# Altium PCB Switch_MCU.PcbDoc
Units mil, origin at the board's own origin, x right, y up, seen from the top; angles counter-clockwise.
Board outline 2390 x 2435 mil, 2 copper layers (Top Layer, Bottom Layer); 69 components, 57 nets, 253 pads, 0 vias.
Unrouted connection lines stored in the file: 142.
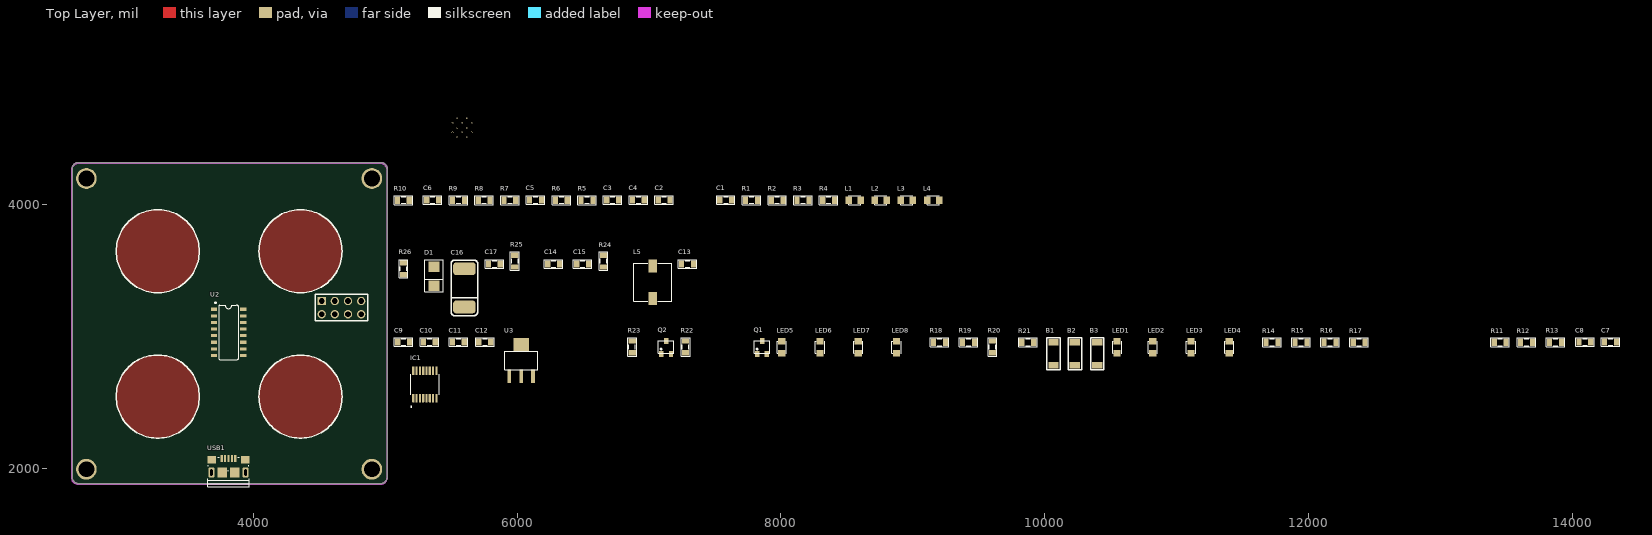
[diagram p0: Top Layer view]
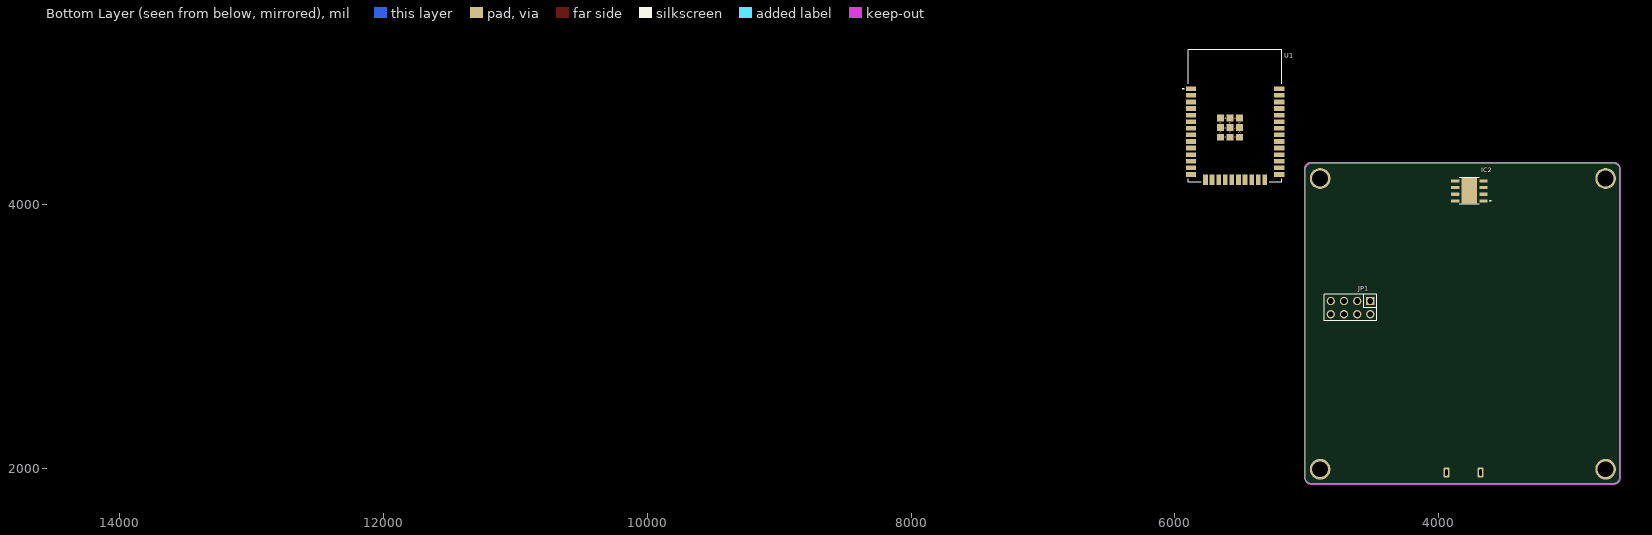
[diagram p1: Bottom Layer view, seen from below]

## Layer stack, top to bottom
Top Solder: solder mask 0.4, Solder Resist, Dk 3.5
Top Layer: signal copper 1.4
Dielectric 1: dielectric 12.6, FR-4, Dk 4.8
Bottom Layer: signal copper 1.4
Bottom Solder: solder mask 0.4, Solder Resist, Dk 3.5

## Board outline
2625,1932.5 2625,4267.5 cw(c2675,4267.5) 2675,4317.5 4965,4317.5 cw(c4965,4267.5) 5015,4267.5 5015,1932.5 cw(c4965,1932.5) 4965,1882.5 2675,1882.5 cw(c2675,1932.5)

## Design rules (kind name [scope] priority, off if disabled: settings)
Clearance [All] p1: gap=15 ignorepadtopadclearanceinfootprint=TRUE
PolygonConnect [All] p1: thpad.connectstyle=Relief thpad.reliefconductorwidth=10 thpad.reliefentries=4 thpad.polygonreliefangle="90 Angle" thpad.airgapwidth=10 smdpad.connectstyle=Relief smdpad.reliefconductorwidth=10 smdpad.reliefentries=4 smdpad.polygonreliefangle="90 Angle" smdpad.airgapwidth=10 via.connectstyle=Direct via.reliefconductorwidth=10 via.reliefentries=4 via.polygonreliefangle="90 Angle" via.airgapwidth=10
RoutingVias [All] p1: holewidth=28 width=50 viastyle="Through Hole" minholewidth=28 minwidth=50 maxholewidth=28 maxwidth=50
SolderMaskExpansion [All] p1: expansion=4 istentingtop=FALSE
Width [All] p1: maxlimit=100 minlimit=10 preferedwidth=50
30 further rules are at their usual default settings.

## Classes and differential pairs
component class U_TTP224: C1 C2 C3 C4 C5 C6 IC1 L1 L2 L3 L4 R1 R2 R3 R4 R5 R6 R7 R8 R9 R10
component class U_TPS5430: C13 C14 C15 C16 C17 D1 IC2 L5 R24 R25 R26
component class U_ESP32: B1 B2 B3 C7 C8 C9 C10 C11 C12 JP1 LED1 LED2 LED3 LED4 LED5 LED6 LED7 LED8 Q1 Q2 R11 R12 R13 R14 R15 R16 R17 R18 R19 R20 R21 R22 R23 U1 U2 U3 USB1

## Components (designator, comment, footprint, x,y, rotation, side; value= is the part's Value field where it differs from the comment)
B1 "Button 3x4x2.5" "Button 3x4x2.5" 10067.5,2867.5 r90 top
B2 "Button 3x4x2.5" "Button 3x4x2.5" 10230,2867.5 r90 top
B3 "Button 3x4x2.5" "Button 3x4x2.5" 10400,2867.5 r90 top
C1 "30pF" CAP_0805 7580,4122.5 r0 top value=33p
C2 "30pF" CAP_0805 7112.5,4122.5 r0 top value=33p
C3 "100nF" CAP_0805 6722.5,4122.5 r0 top value=33p
C4 "10uF" CAP_0805 6917.5,4122.5 r0 top value=33p
C5 "30pF" CAP_0805 6137.5,4122.5 r0 top value=33p
C6 "30pF" CAP_0805 5357.5,4122.5 r0 top value=33p
C7 "100nF" CAP_0805 14290,3045 r0 top value=33p
C8 "10uF" CAP_0805 14095,3045 r0 top value=33p
C9 "10uF" CAP_0805 5137.5,3045 r0 top value=33p
C10 "100nF" CAP_0805 5332.5,3045 r0 top value=33p
C11 "10uF" CAP_0805 5552.5,3045 r0 top value=33p
C12 "100nF" CAP_0805 5752.5,3045 r0 top value=33p
C13 "100nF" CAP_0805 7290,3637.5 r0 top value=33p
C14 "100nF" CAP_0805 6275,3637.5 r0 top value=33p
C15 "10uF" CAP_0805 6495,3637.5 r0 top value=33p
C16 "220uF" CAP_7343 5600,3372.5 r90 top
C17 "10uF" CAP_0805 5825,3637.5 r0 top value=33p
D1 "SS14" DO-214AC(SMA) 5367.5,3477.5 r90 top value=1N5007
IC1 "TTP224" TTP224 5280,2655 r90 top
IC2 "TPS5430-2" TPS5430 3767.18,4102.19 r0 bottom
JP1 "JP 2x4 2.54" "JP 2x4 DT" 4667.5,3217.5 r0 bottom
L1 "LED" LED-0805-Red 8515,4032.5 r0 top value="LED 3 ly Single Colour"
L2 "LED" LED-0805-Red 8712.5,4032.5 r0 top value="LED 3 ly Single Colour"
L3 "LED" LED-0805-Red 8910,4032.5 r0 top value="LED 3 ly Single Colour"
L4 "LED" LED-0805-Red 9110,4032.5 r0 top value="LED 3 ly Single Colour"
L5 "22uH" L_SMD 7022.5,3422.5 r0 top value="150 mH"
LED1 "LED" LED-0805-Red 10550,2872.5 r90 top value="LED 3 ly Single Colour"
LED2 "LED" LED-0805-Red 10820,2872.5 r90 top value="LED 3 ly Single Colour"
LED3 "LED" LED-0805-Red 11110,2872.5 r90 top value="LED 3 ly Single Colour"
LED4 "LED" LED-0805-Red 11400,2872.5 r90 top value="LED 3 ly Single Colour"
LED5 "LED" LED-0805-Red 8007.5,2872.5 r90 top value="LED 3 ly Single Colour"
LED6 "LED" LED-0805-Red 8297.5,2872.5 r90 top value="LED 3 ly Single Colour"
LED7 "LED" LED-0805-Red 8587.5,2872.5 r90 top value="LED 3 ly Single Colour"
LED8 "LED" LED-0805-Red 8877.5,2872.5 r90 top value="LED 3 ly Single Colour"
Q1 "C1815" SOT23D 7857.5,2915 r0 top
Q2 "C1815" SOT23D 7130,2915 r0 top
R1 "1k" RES-SMD-0805 7777.5,4032.5 r0 top
R2 "1k" RES-SMD-0805 7972.5,4032.5 r0 top
R3 "1k" RES-SMD-0805 8167.5,4032.5 r0 top
R4 "1k" RES-SMD-0805 8362.5,4032.5 r0 top
R5 "0R" RES-SMD-0805 6530,4032.5 r0 top
R6 "0R" RES-SMD-0805 6335,4032.5 r0 top
R7 "0R" RES-SMD-0805 5945,4032.5 r0 top
R8 "0R" RES-SMD-0805 5750,4032.5 r0 top
R9 "0R" RES-SMD-0805 5555,4032.5 r0 top
R10 "0R" RES-SMD-0805 5137.5,4032.5 r0 top
R11 "10k" RES-SMD-0805 13455,2955 r0 top
R12 "10k" RES-SMD-0805 13655,2955 r0 top
R13 "10k" RES-SMD-0805 13875,2955 r0 top
R14 "1k" RES-SMD-0805 11725,2955 r0 top
R15 "1k" RES-SMD-0805 11945,2955 r0 top
R16 "1k" RES-SMD-0805 12165,2955 r0 top
R17 "1k" RES-SMD-0805 12385,2955 r0 top
R18 "1k" RES-SMD-0805 9202.5,2955 r0 top
R19 "1k" RES-SMD-0805 9422.5,2955 r0 top
R20 "1k" RES-SMD-0805 9605,2920 r90 top
R21 "1k" RES-SMD-0805 9872.5,2955 r0 top
R22 "10k" RES-SMD-0805 7277.5,2920 r90 top
R23 "10k" RES-SMD-0805 6872.5,2920 r90 top
R24 "100k" RES-SMD-0805 6655,3570 r90 top
R25 "10k" RES-SMD-0805 5982.5,3570 r90 top
R26 "6.2k" RES-SMD-0805 5137.5,3512.5 r90 top
U1 "ESP32-WROOM-32" MODULE_ESP32-WROOM-32 5542.85,4670.41 r180 bottom
U2 "CH340C" SO016 3812.26,3030 r270 top
U3 "LM1117-ADJ" LM1117-SOP 6030,2747.5 r0 top
USB1 "USB Micro 5p DIP" "USB Micro 5p DIP" 3811.18,1967.18 r0 top

## Footprints (in the part's own frame and the unit in brackets; to place one, negate y for a bottom-side part, rotate by r counter-clockwise, add the part's x,y. Pads: shape width x height; smd on the part's side, far side on the other; paste and mask are expansions set on the pad)
"Button 3x4x2.5" [mm]
  rect 1.3x2 smd: 1(-2.2,0) 2(2.2,0)
  silkscreen extent -3.05,-1.27 3.05,1.27, body extent -2.45,-1.45 2.45,1.45, height 2
CAP_0805 [mil]
  rect 39.37x55 smd: 1(-42.85,-88.11) 2(47.15,-88.11)
  silkscreen extent -68,-122 72,-55, body extent -38,-114 42,-64, height 24
CAP_7343 [mm] "Capacitor Tantalum 7343"
  rrect50% 2.5x4.3 smd: 1(-3.81,0) 2(3.556,0)
  silkscreen extent -5.46,-2.54 5.21,2.54, body extent -3.81,-2.29 3.56,2.29, height 3
DO-214AC(SMA) [mm] "DO-214AC Diode Smallest Size"
  rect 2x2.1 smd: 1(1.245,-0.076) 2(-2.367,-0.076)
  silkscreen extent -3.56,-1.86 2.62,1.76, body extent -3.13,-1.38 2.07,1.22, height 2.4
"JP 2x4 DT" [mm]
  rect 1.61x1.6 hole 1.1: 1(-3.81,-1.27)
  oval 1.61x1.6 hole 1.1: 2(-1.27,-1.27) 3(1.27,-1.27) 4(3.81,-1.27) 5(3.81,1.27) 6(1.27,1.27) 7(-1.27,1.27) 8(-3.81,1.27)
  silkscreen extent -5.08,-2.54 5.08,2.54, body extent -5.08,-2.54 5.08,2.54, height 8.55
L_SMD [mm]
  rect 1.7x2.5 smd: 1(0.15,2.8) 2(0.15,-3.4)
  silkscreen extent -3.5,-3.95 3.8,3.35, body extent -3.5,-3.95 3.8,3.35, height 4.05
LED-0805-Red [mil]
  rect 50x55 smd: 1(0,0) 2(90,0)
  silkscreen extent 0,-35 90,35, body extent 5,-25 85,25, height 43
LM1117-SOP [mm]
  rect 0.7x2.54 smd: 1(-2.3,-1.27) 2(0,-1.27) 3(2.3,-1.27)
  rect 3x2.54 smd: 2(0,4.826)
  silkscreen extent -3.17,0 3.17,3.56, body extent -3.25,-1.78 3.25,5.18, height 1.68
MODULE_ESP32-WROOM-32 [mm]
  rect 2x0.9 smd: 1(-8.5,5.26) 2(-8.5,3.99) 3(-8.5,2.72) 4(-8.5,1.45) 5(-8.5,0.18) 6(-8.5,-1.09) 7(-8.5,-2.36) 8(-8.5,-3.63) 9(-8.5,-4.9) 10(-8.5,-6.17) 11(-8.5,-7.44) 12(-8.5,-8.71) 13(-8.5,-9.98) 14(-8.5,-11.25) 25(8.5,-11.25) 26(8.5,-9.98) 27(8.5,-8.71) 28(8.5,-7.44) 29(8.5,-6.17) 30(8.5,-4.9) 31(8.5,-3.63) 32(8.5,-2.36) 33(8.5,-1.09) 34(8.5,0.18) 35(8.5,1.45) 36(8.5,2.72) 37(8.5,3.99) 38(8.5,5.26)
  rect 0.9x2 smd: 15(-5.715,-12.25) 16(-4.445,-12.25) 17(-3.175,-12.25) 18(-1.905,-12.25) 19(-0.635,-12.25) 20(0.635,-12.25) 21(1.905,-12.25) 22(3.175,-12.25) 23(4.445,-12.25) 24(5.715,-12.25)
  rect 1.33x1.33 smd: 39_1(-2.835,-0.405) 39_2(-1,-0.405) 39_3(0.835,-0.405) 39_4(-2.835,-2.24) 39_5(-1,-2.24) 39_6(0.835,-2.24) 39_7(-2.835,-4.075) 39_8(-1,-4.075) 39_9(0.835,-4.075)
  round 0.3 hole 0.2: 39_10(-1.917,-0.405) 39_11(-0.082,-0.405) 39_12(-2.835,-1.322) 39_13(-1,-1.322) 39_14(0.835,-1.322) 39_15(-1.917,-2.24) 39_16(-0.082,-2.24) 39_17(-2.835,-3.157) 39_18(-1,-3.157) 39_19(0.835,-3.157) 39_20(-1.917,-4.075) 39_21(-0.082,-4.075)
  silkscreen extent -10.1,-12.75 9,12.75, body extent -9.02,-12.75 8.98,12.75, height 3.2
RES-SMD-0805 [mil]
  rect 39.37x55 smd: 1(-45,0) 2(45,0)
  silkscreen extent -70,-34 70,33, body extent -39,-25 39,25, height 31
SO016 [mm]
  rect 0.6x1.2 smd: 1(-4.445,-2.8) 2(-3.175,-2.8) 3(-1.905,-2.8) 4(-0.635,-2.8) 5(0.635,-2.8) 6(1.905,-2.8) 7(3.175,-2.8) 8(4.445,-2.8) 9(4.445,2.8) 10(3.175,2.8) 11(1.905,2.8) 12(0.635,2.8) 13(-0.635,2.8) 14(-1.905,2.8) 15(-3.175,2.8) 16(-4.445,2.8)
  silkscreen extent -5.84,-2.67 5.26,1.95, body extent -4.99,-3.13 4.99,3.1, height 1.58
SOT23D [mm] "SOT 23C - 1-3-2 - BCE"
  rect 0.85x1.2 smd: 1(-0.95,-1.25) 2(0.94,-1.245) 3(0,1.25)
  silkscreen extent -1.5,-1.14 1.5,1.32, body extent -1.5,-1.17 1.5,1.33, height 1.06
TPS5430 [mm]
  rrect10% 1.55x0.6 smd mask+0: 1(-2.692,1.897) 2(-2.692,0.627) 3(-2.692,-0.643) 4(-2.692,-1.913) 5(2.708,-1.913) 6(2.708,-0.643) 7(2.708,0.627) 8(2.708,1.897)
  rect 2.95x4.9 smd paste-3 mask+0: 9(0.008,-0.008)
  silkscreen extent -4.16,-2.53 1.96,2.52, body extent -3,-2.45 3,2.45, height 1.7
TTP224 [mm]
  rrect25% 1.65x0.41 smd: 1(-3.129,1.71) 2(-3.129,1.075) 3(-3.129,0.44) 4(-3.129,-0.195) 5(-3.129,-0.83) 6(-3.129,-1.465) 7(-3.129,-2.1) 8(-3.129,-2.735) 9(2.131,-2.735) 10(2.131,-2.1) 11(2.131,-1.465) 12(2.131,-0.83) 13(2.131,-0.195) 14(2.131,0.44) 15(2.131,1.075) 16(2.131,1.71)
  silkscreen extent -4.88,-3.26 1.45,2.24, body extent -3.5,-2.96 2.5,1.94, height 1.75
"USB Micro 5p DIP" [mm]
  rect 0.4x1.35 smd mask+0.05: 1(-1.3,2.675) 2(-0.65,2.675) 3(0,2.675) 4(0.65,2.675) 5(1.3,2.675)
  rrect60% 1.2x2 hole 0.5 slot 1.2 at 90 deg: 5(-3.3,0) 5(3.3,0)
  rect 1.6x1.4 smd: 5(-3.2,2.45) 5(3.2,2.45)
  rect 1.9x1.9 smd paste-10: 5(-1.2,0) 5(1.2,0)
  silkscreen extent -4,-2.75 4,2.95, body extent -3.93,-2.76 3.93,2.9, height 2.85

## Part data
C1 C2 C3 C4 C5 C6 C7 C8 C9 C10 C11 C12 C13 C14 C15 C17: library part CapSMD, "Capacitor", LatestRevisionDate=17-Jul-2002, LatestRevisionNote="Re-released for DXP Platform.", PackageReference=RAD-0.3, Published=8-Jun-2000, Publisher="Altium Limited"
C16: library part CAP_TAN_SMD, "Polazied Tantalum Capacitor"
D1: library part "Diode SMD", "SS34 Diode Schottky 3A 40V SMA(DO-214AC)", Code - JEDEC=DO-214-AB, Published=8-Jun-2000, Publisher="Altium Limited", Revision="July-2002: Re-released for DXP Platform."
JP1: library part "JP 2x4 2.54 Duc Thang", "Cắm", Chung_Loai=Cắm, Don_Vi=Con, Ma_Hang=MH002686, Ten_Linh_Kien="Jump Đôi Đực 2.54MM 2x40P Thẳng 11MM"
L1 L2 L3 L4 LED1 LED2 LED3 LED4 LED5 LED6 LED7 LED8: "LED Single colour Green and Red"
L5: library part Inductor, "CD73R 22uH 1.23A 7345"
Q1 Q2: library part 2SC1815, "NPN 600mW, ECB"
R1 R2 R3 R4 R5 R6 R7 R8 R9 R10 R11 R12 R13 R14 R15 R16 R17 R18 R19 R20 R21 R22 R23 R24 R25 R26: library part "Resistor - SMD", "Resistor", Manufacturer="Generic Components", Class=Passive, Published=08/06/2000, Publisher="Altium Hobart Technology Centre"
U1: "Bluetooth, WiFi Transceiver Module 2.4GHz ~ 2.5GHz Surface Mount", Package="Module Espressif Systems", Digi-Key_Part_Number=1904-1010-1-ND, Digi-Key_Purchase_URL=https://www.digikey.com/product-detail/en/espressif-systems/ESP32-WROOM-32/1904-1010-1-ND/8544305?utm_source=snapeda&utm_medium=aggregator&utm_campaign=symbol, MF="Espressif Systems", MP=ESP32-WROOM-32, SnapEDA_Link=https://www.snapeda.com/parts/ESP32-WROOM-32/Espressif%20Systems/view-part/2753322/?ref=snap
U2: "USB to serial chip CH340", Package=Package, Availability=Unavailable, Check_prices=https://www.snapeda.com/parts/CH340C/WCH/view-part/5428851/?ref=eda, MF=WCH, MP=CH340C, Price=None, SnapEDA_Link=https://www.snapeda.com/parts/CH340C/WCH/view-part/5428851/?ref=snap
U3: "800mA Low-Dropout Linear Regulator", Creator="Nguyen Ba Bien", Website=http://group3i.net
USB1: "USB Type B", Ma_Hang=MH005145, Ten="MicroUSB MK5P DIP"

## Free pads (board coordinates)
  round 157.48 hole 120: 0(2733.32,1991.99) 0(2733.32,4196.99) 0(4898.32,1991.99) 0(4898.32,4196.99)

## Nets (pads, with @x,y where several pads share a name; then routed paths per layer and width w, separated by ;. In a path a pad name is that pad's centre, name@x,y a point inside that pad or via, vN(x,y) a via of type N, cw(c..) or ccw(c..) an arc to the next point about the centre after c; other vN are vias at no path point)
+3.3V: C3.2 C4.2 C7.1 C8.1 C11.1 C12.1 C16.1 C17.1 IC1.6 L5.2 R5.2 R6.2 R7.2 R11.1 R12.1 R13.1 R14.2 R15.2 R16.2 R17.2 R25.2 U1.2 U2.4 U2.16 U3.2
+5: C9.1 C10.1 U3.3 USB1.1
+12V: C14.2 C15.2 IC2.7 JP1.1 JP1.2 R24.1
AHLB: IC1.5 R5.1
CH340_RXD: U1.35 U2.3
CH340_TXD: U1.34 U2.2
D_N: U2.6 USB1.2
D_P: U2.5 USB1.3
DTR: Q2.2 R22.1 U2.13
EN: B2.2 Q1.3 R12.2 U1.3
GND: B1.1 B2.1 B3.1 C1.1 C2.1 C3.1 C4.1 C5.1 C6.1 C7.2 C8.2 C9.2 C10.2 C11.2 C12.2 C14.1 C15.1 C16.2 C17.2 D1.1 IC1.10 IC2.6 IC2.9 JP1.3 JP1.4 L1.2 L2.2 L3.2 L4.2 R8.2 R9.2 R10.2 R18.2 R19.2 R20.2 R21.2 R26.1 U1.1 U2.1 U3.1 USB1.5
IO0: B3.2 Q2.3 R13.2 U1.25
IO13: U1.16
IO16: U1.27
IO17: U1.28
IO18: U1.30
IO19: IC1.16 R4.1 U1.31
IO21: IC1.15 R3.1 U1.33
IO22: IC1.14 R2.1 U1.36
IO23: IC1.13 R1.1 U1.37
IO25: U1.10
IO26: LED3.1 LED6.2 U1.11
IO27: B1.2 LED4.1 LED5.2 R11.2 U1.12
IO32: LED1.1 LED8.2 U1.8
IO33: LED2.1 LED7.2 U1.9
LPMB: IC1.8 R7.1
MOT0: IC1.9 R10.1
NetC1_2: C1.2 IC1.1
NetC2_2: C2.2 IC1.2
NetC5_2: C5.2 IC1.3
NetC6_2: C6.2 IC1.4
NetC13_1: C13.1 D1.2 IC2.8 L5.1
NetC13_2: C13.2 IC2.1
NetIC2_4: IC2.4 R25.1 R26.2
NetIC2_5: IC2.5 R24.2
NetL1_1: L1.1 R1.2
NetL2_1: L2.1 R2.2
NetL3_1: L3.1 R3.2
NetL4_1: L4.1 R4.2
NetLED1_2: LED1.2 R18.1
NetLED2_2: LED2.2 R19.1
NetLED3_2: LED3.2 R20.1
NetLED4_2: LED4.2 R21.1
NetLED5_1: LED5.1 R14.1
NetLED6_1: LED6.1 R15.1
NetLED7_1: LED7.1 R16.1
NetLED8_1: LED8.1 R17.1
NetQ1_1: Q1.1 R22.2
NetQ2_1: Q2.1 R23.2
OD: IC1.11 R9.1
RL1: JP1.8
RL2: JP1.7
RL3: JP1.6
RL4: JP1.5
RST: Q1.2 R23.1 U2.14
SM: IC1.12 R8.1
TOG: IC1.7 R6.1
pads on no net: IC2.2 IC2.3 U1.4 U1.5 U1.6 U1.7 U1.13 U1.14 U1.15 U1.17 U1.18 U1.19 U1.20 U1.21 U1.22 U1.23 U1.24 U1.26 U1.29 U1.32 U1.38 U1.39_1 U1.39_2 U1.39_3 U1.39_4 U1.39_5 U1.39_6 U1.39_7 U1.39_8 U1.39_9 U1.39_10 U1.39_11 U1.39_12 U1.39_13 U1.39_14 U1.39_15 U1.39_16 U1.39_17 U1.39_18 U1.39_19 U1.39_20 U1.39_21 U2.7 U2.8 U2.9 U2.10 U2.11 U2.12 U2.15 USB1.4

## Polygon pours and split planes (outlines as drawn)
NetC6_2 on Top Layer "100" (solid, pour order 7): 4042.11,2543.24 ccw(c4357.07,2543.24) 4357.07,2228.28 ccw(c4357.07,2543.24) 4672.03,2543.24 ccw(c4357.07,2543.24) 4357.07,2858.2 ccw(c4357.07,2543.24)
NetC5_2 on Top Layer "100" (solid, pour order 6): 2959.61,2543.24 ccw(c3274.57,2543.24) 3274.57,2228.28 ccw(c3274.57,2543.24) 3589.53,2543.24 ccw(c3274.57,2543.24) 3274.57,2858.2 ccw(c3274.57,2543.24)
NetC2_2 on Top Layer "100" (solid, pour order 5): 4042.11,3645.74 ccw(c4357.07,3645.74) 4357.07,3330.78 ccw(c4357.07,3645.74) 4672.03,3645.74 ccw(c4357.07,3645.74) 4357.07,3960.7 ccw(c4357.07,3645.74)
NetC1_2 on Top Layer "100" (solid, pour order 4): 3274.57,3330.78 cw(c3274.57,3645.74) 2959.61,3645.74 cw(c3274.57,3645.74) 3274.57,3960.7 cw(c3274.57,3645.74) 3589.53,3645.74 cw(c3274.57,3645.74)

## Keep-outs
Keep-Out Layer:
  lines w10: 2623.32,1926.99 ccw(c2673.32,1926.99) 2673.32,1876.99 4963.32,1876.99 ccw(c4963.32,1926.99) 5013.32,1926.99 5013.32,4261.99 ccw(c4963.32,4261.99) 4963.32,4311.99 2863.32,4311.99 2673.32,4311.99 ccw(c2673.32,4261.99) 2623.32,4261.99 2623.32,1926.99 ; 2625,1932.5 ccw(c2675,1932.5) 2675,1882.5 4965,1882.5 ccw(c4965,1932.5) 5015,1932.5 5015,4267.5 ccw(c4965,4267.5) 4965,4317.5 2865,4317.5 2675,4317.5 ccw(c2675,4267.5) 2625,4267.5 2625,1932.5

## Silkscreen, mask and mechanical layers (free items; w line width, h text height)
Top Overlay:
  circle w10: c4357.07,2543.24 r314.96
  circle w10: c4357.07,3645.74 r314.96
  circle w10: c3274.57,2543.24 r314.96
  circle w10: c3274.57,3645.74 r314.96
  lines w10: 4467.5,3117.5 4867.5,3117.5 4867.5,3317.5 4467.5,3317.5 4467.5,3117.5

## Text inside footprints (layer, text, board x,y; h text height)
U1: Mechanical 13 "ANTENNA" at 5779.07,5024.74 h70